# Altium PCB PCB1.PcbDoc (part 2 of 2)
Units mil, origin at the board's own origin, x right, y up, seen from the top; angles counter-clockwise.
Board outline 1411.86 x 1442.8 mil, 4 copper layers (Top Layer, GND, Sign, Bottom Layer), stack 74.06 mil thick; 79 components, 66 nets, 343 pads, 393 vias.
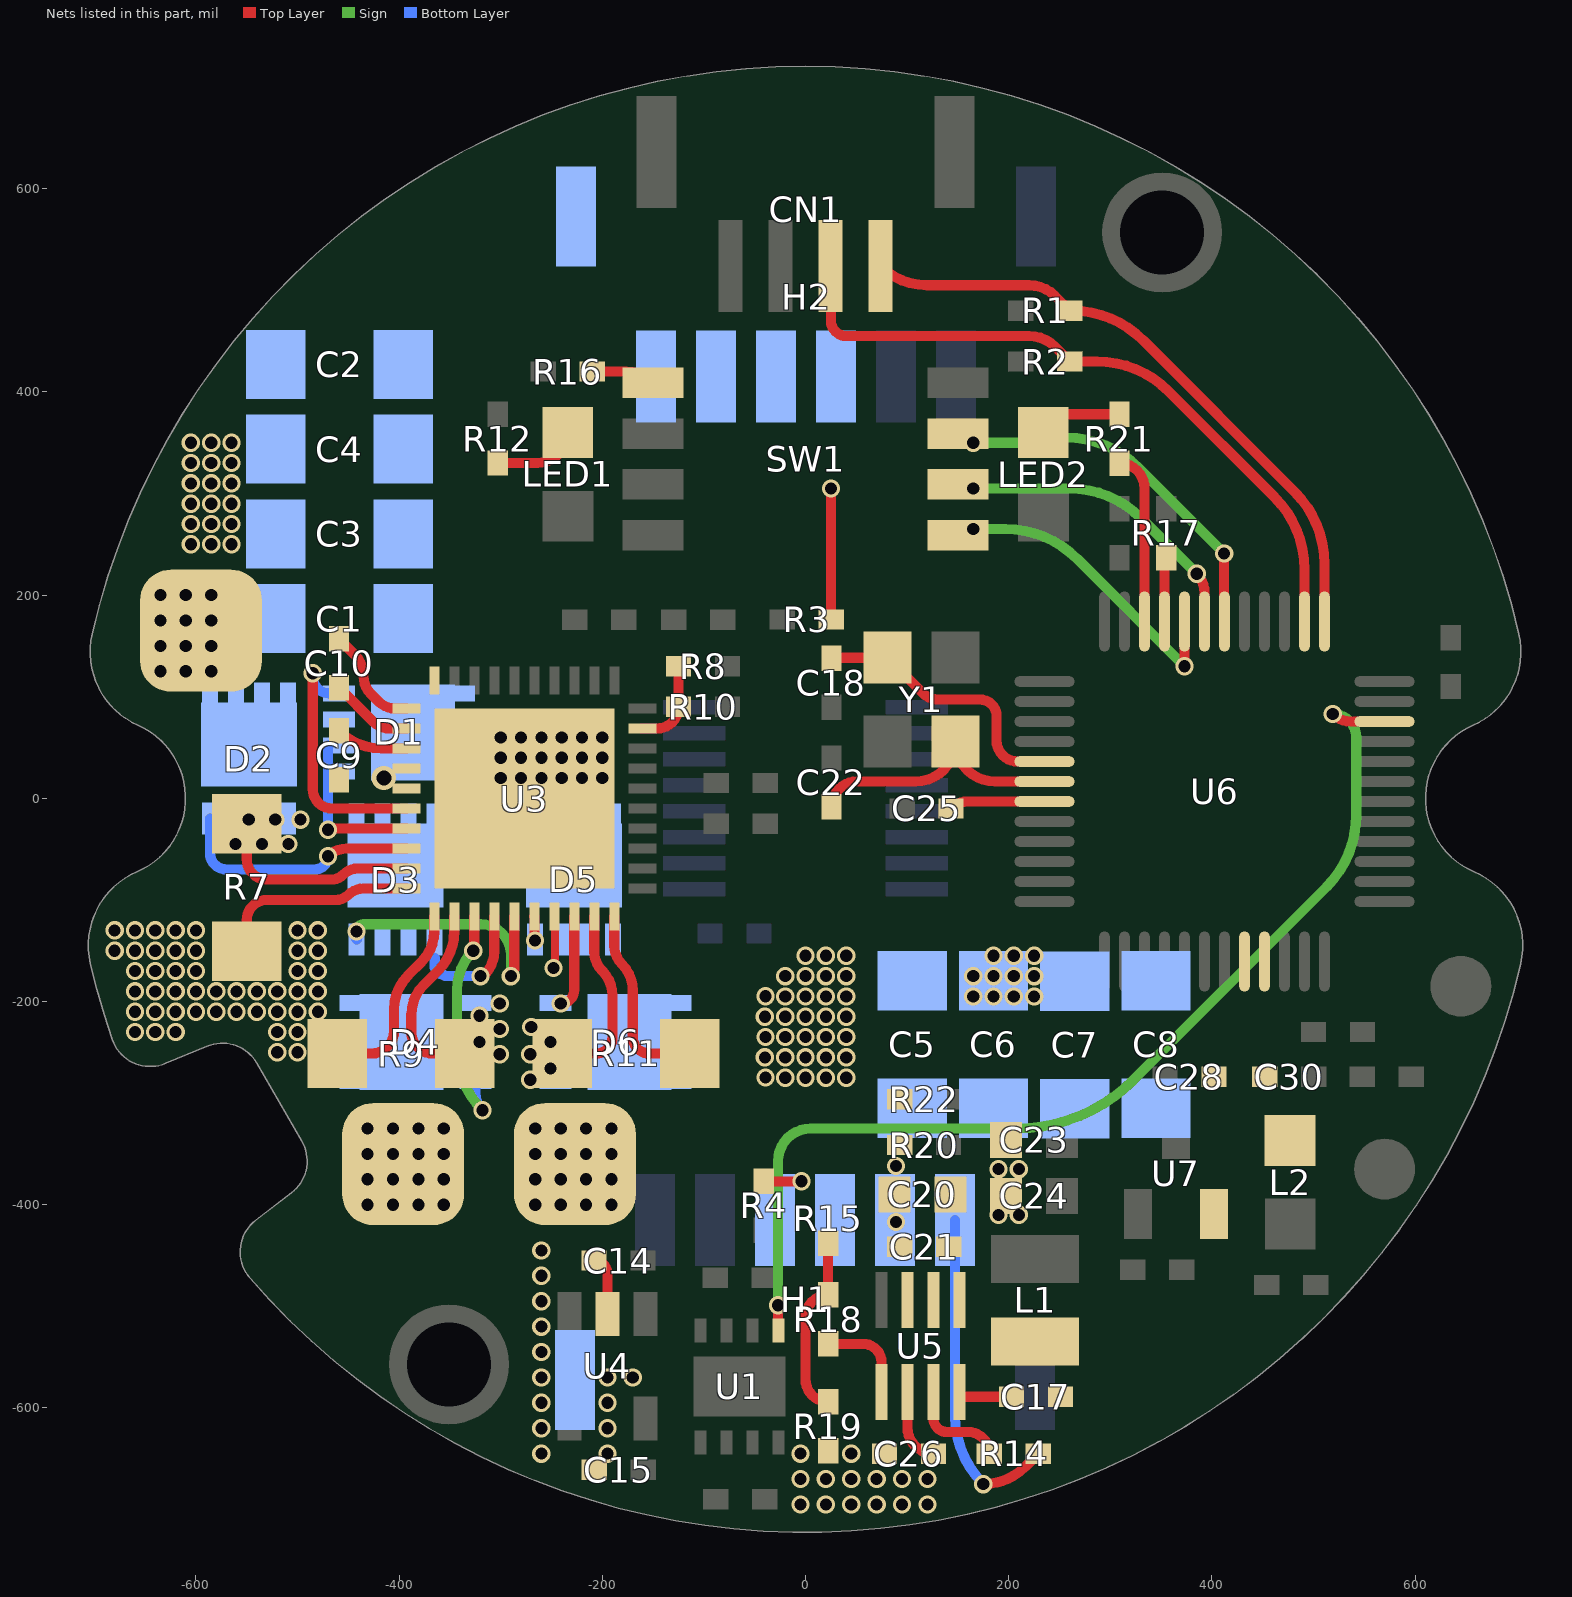
[diagram p4: the nets of this part, all layers, seen from the top]

## Via types
v1: diameter 18, hole 12, Top Layer to Bottom Layer, tented both sides, 391 vias
v2: diameter 24, hole 15, Top Layer to Bottom Layer, tented both sides, 2 vias

## Nets (pads, with @x,y where several pads share a name; then routed paths per layer and width w, separated by ;. In a path a pad name is that pad's centre, name@x,y a point inside that pad or via, vN(x,y) a via of type N, cw(c..) or ccw(c..) an arc to the next point about the centre after c; other vN are vias at no path point) (continued)
FDCAN_TX: U1.1 U6.34 | length 1060.7
  Top Layer w10: v1(-27,-499) -27,-523.86 U1.1@-26.71,-523.86 ; v1@519,83 ccw(c536.86,100.86) 536.86,75.6 U6.34@569.86,75.6
  Sign w10: v1(-27,-499) -27,-357 cw(c5,-357) 5,-325 207.53,-325 ccw(c207.57,-162.22) 322.71,-277.29 512.71,-87.29 ccw(c442,-16.58) 542,-16.58 542,60 ccw(c519,60) v1(519,83)
NetC9_1: C9.1 U3.3 | length 70.8
  Top Layer w10: C9.1@-459.14,66.35 ccw(c-417.18,108.31) -417.18,48.97 U3.3@-392.97,48.97
NetC10_1: C10.1 U3.1 | length 104.6
  Top Layer w10: C10.1@-459.14,156.97 -444.07,141.9 cw(c-465.98,120) -435,120 ccw(c-410.86,120) -427.93,102.93 -420,95 ; -420,95 ccw(c-403.94,111.06) -403.94,88.35 U3.1@-392.97,88.35
NetC10_2: C10.2 U3.2 | length 81.9
  Top Layer w10: C10.2@-459.14,108.77 -458.77,108.77 -425,75 ; -425,75 ccw(c-409.69,90.31) -409.69,68.66 U3.2@-392.97,68.66
NetC17_1: C17.1 U5.4 | length 55.1
  Top Layer w10: U5.4@151.52,-584.52 151.52,-588.06 152.42,-588.97 C17.1@202.73,-588.97
NetC17_2: C17.2 L1.1 U5.6
NetC18_1: C18.1 U6.5 Y1.3 | length 270.5
  Top Layer w10: C18.1@26.02,138.38 Y1.3@80.54,138.38 115.76,103.15 ccw(c130.11,117.5) 130.11,97.21 171.79,97.21 cw(c171.79,81) 188,81 188,57 ccw(c208.77,57) 208.77,36.23 U6.5@235.22,36.23
NetC22_1: C22.1 U6.6 Y1.1 | length 268.7
  Top Layer w10: C22.1@25.54,-8.5 cw(c50.58,-8.5) 50.58,16.54 108.31,16.54 ccw(c108.31,55.7) Y1.1@147.47,55.7 ccw(c186.63,55.7) 186.63,16.54 U6.6@235.22,16.54
NetC25_1: C25.1 U6.7 | length 93.9
  Top Layer w10: C25.1@143.2,-10 cw(c159.77,-26.57) 159.77,-3.14 U6.7@235.22,-3.14
NetC26_2: C26.2 U5.2 | length 75.1
  Top Layer w10: U5.2@100.34,-584.52 100.34,-619.38 ccw(c125.93,-619.38) C26.2@125.93,-644.97
NetC28_1: C28.1 U6.20 U7.2
NetC30_2: C30.2 L2.2 U6.21
NetD1_G: D1.G U3.6 | length 245.6
  Top Layer w10: v1(-485,123) -485,9 ccw(c-465.92,9) -465.92,-10.08 U3.6@-392.97,-10.08
  Bottom Layer w10: v1(-485,123) -485,119.33 ccw(c-469.06,119.33) D1.G@-469.06,103.39
NetD2_G: D2.G U3.8 | length 247.9
  Top Layer w10: v1@-469.98,-56.98 cw(c-451.78,-75.22) -451.78,-49.45 U3.8@-392.97,-49.45
  Sign w10: v1@-471.61,-58.53 ccw(c-501.38,-25.62) v1@-470,-57
  Bottom Layer w10: D2.G@-586.18,-20 -586.18,-53.82 ccw(c-570,-53.82) -570,-70 -483,-70 ccw(c-483,-57) v1(-470,-57)
NetD2_S: D2.S R7.2 U3.9 | length 206.3
  Top Layer w10: R7.2@-550,-25 -550,-60 ccw(c-530,-60) -530,-80 -467.07,-80 ccw(c-467.07,-62.93) -455,-75 ; -455,-75 cw(c-440.86,-89.14) -440.86,-69.14 U3.9@-392.97,-69.14
  other v1: -561,-45 -535,-45 -509,-45 -548,-21 -522,-21 -497,-21
NetD3_G: D3.G U3.15 | length 261.8
  Top Layer w10: v1@-290,-175 ccw(c-298.04,-166.96) -287.05,-169.89 ccw(c-298.04,-166.96) -286.67,-166.96 U3.15@-286.67,-116.39
  Sign w10: v1(-442,-131) cw(c-435,-131) -435,-124 -320,-124 cw(c-320,-154) -290,-154 v1(-290,-175)
  Bottom Layer w10: v1(-442,-131) -442,-132 -441.78,-132.22 D3.G@-441.78,-139.06
NetD4_G: D4.G U3.13 | length 232.4
  Top Layer w10: v1(-327,-150) -326.12,-149.12 -326.12,-116.46 U3.13@-326.04,-116.39
  Sign w10: v1@-327,-150 ccw(c-288.37,-188.63) -343,-188.63 -343,-246.64 ccw(c-257.64,-246.64) v1@-318,-307
  Bottom Layer w10: D4.G@-324.94,-278.39 -324.94,-290.25 ccw(c-301.25,-290.25) v1(-318,-307)
NetD4_S: D4.S R9.2 U3.12 | length 191.7
  Top Layer w10: U3.12@-345.73,-116.39 -345.73,-130.86 cw(c-400.94,-130.86) -361.93,-169.93 -375.98,-183.98 ccw(c-346.96,-213) -388,-213 -388,-230 ccw(c-366.7,-230) -366.64,-251.3 R9.2@-335.46,-251.3
  other v1: -301,-252 -321,-240 -301,-227 -321,-214 -301,-202
NetD5_G: D5.G U3.16 | length 23.8
  Top Layer w10: U3.16@-266.99,-116.39 -266.91,-116.46 -266.91,-139.31 v1(-266.32,-139.9)
NetD6_G: D6.G U3.18 | length 93.7
  Top Layer w10: v1(-241,-202) ccw(c-241,-188.62) -227.62,-188.62 U3.18@-227.62,-116.39
  Bottom Layer w10: D6.G@-241.06,-201.61 -241.06,-201.94 v1(-241,-202)
NetD6_S: D6.S R11.2 U3.19 | length 182.2
  Top Layer w10: R11.2@-239.46,-251.3 -206.3,-251.3 ccw(c-206.3,-235) -190,-235 -190,-194.13 ccw(c-224.12,-194.13) -199.99,-170.01 cw(c-180.83,-150.85) -207.93,-150.85 U3.19@-207.93,-116.39
  other v1: -271,-277 -251,-266 -271,-252 -251,-240 -270,-225
NetLED1_1: LED1.1 R12.2 | length 86.1
  Top Layer w10: R12.2@-303,330 -264,330 ccw(c-264,360) LED1.1@-234,360
NetLED2_1: LED2.1 R21.2 | length 81.6
  Top Layer w10: LED2.1@234,360 255.43,378 R21.2@309,378
NetR8_2: R8.2 R10.2 U3.29 | length 87.9
  Top Layer w10: U3.29@-160.69,68.66 -146.34,68.66 ccw(c-146.34,90) R10.2@-125,90 R8.2@-125,130
NetR14_2: R14.2 U5.3 | length 100.7
  Top Layer w10: U5.3@125.93,-584.52 125.93,-610.17 ccw(c139.83,-610.17) 130,-620 ; 130,-620 ccw(c138.57,-611.43) 138.57,-623.55 159.51,-623.55 cw(c159.51,-644.97) R14.2@180.93,-644.97
NetR15_1: R15.1 R18.2 R19.2 | length 181.5
  Top Layer w10: R19.2@22.26,-594.06 cw(c22.26,-571.8) 0,-571.8 0,-511.03 cw(c22.26,-511.03) R18.2@22.26,-488.77 R15.1@22.26,-437.97
NetR16_2: R16.2 SW1.5 | length 62.9
  Top Layer w10: R16.2@-210,420 -176.56,420 cw(c-176.56,382.44) SW1.5@-150,409
NetR17_1: R17.1 U6.45 | length 63.2
  Top Layer w10: U6.45@353.33,174.02 353.33,232.77 cw(c359.03,232.77) R17.1@355,236.8
NetR18_1: R18.1 U5.1 | length 92.3
  Top Layer w10: R18.1@22.26,-536.97 56.72,-536.97 cw(c56.72,-555) 74.75,-555 U5.1@74.75,-584.52
PGND: C1.1 C2.1 C3.1 C4.1 C5.1 C6.1 C7.1 C8.1 C14.1 C15.1 C20.1 C21.1 C23.1 C24.1 C26.1 H1.3 H1.4 H1.7 H2.3 H2.4 H2.8 R3.2 R4.2 R7.1 R9.1 R11.1 R19.1 R22.2 U3.10 U3.11 U3.20 U3.40 U3.41 U4.2 U5.5 | length 810.3
  Top Layer w10: R7.1@-550,-150.4 -550,-120 cw(c-530,-120) -530,-100 -462.07,-100 ccw(c-462.07,-82.93) -450,-95 ; R9.1@-460.86,-251.3 -427.3,-251.3 ccw(c-427.3,-229) -405,-229.09 -405,-208 cw(c-356.72,-208) -390.88,-173.88 -377.72,-160.72 ccw(c-407.44,-131) -365.41,-131.06 ccw(c-407.44,-131) -365.41,-131 U3.11@-365.41,-116.39 ; -450,-95 cw(c-435.09,-109.91) -435.09,-88.82 U3.10@-392.97,-88.82 ; C14.1@-208.2,-455 cw(c-208.2,-468.2) -195,-468.2 U4.2@-195,-507.81 ; U3.20@-188.25,-116.39 -188.25,-145.08 ccw(c-162.5,-145.08) -180.71,-163.29 cw(c-206.56,-189.14) -170,-189.14 -170,-235 ccw(c-153.7,-235) -153.7,-251.3 R11.1@-114.06,-251.3 ; R4.2@-40.8,-377 v1(-4,-377) ; R3.2@25,176.2 25.1,176.3 25.1,304.9 v1(25,305)
  other v1: -5,-695 20,-695 45,-695 70,-695 95,-695 120,-695 -5,-670 20,-670 45,-670 70,-670 95,-670 120,-670 -260,-645 -195,-645 -5,-645 45,-645 -260,-620 -195,-620 -260,-595 -195,-595 -260,-570 -195,-570 -170,-570 -260,-545 -260,-520 -260,-495 -260,-470 -260,-445 190,-410 210,-410 190,-365 210,-365 -39.39,-274.87 -20,-275 0,-275 20,-275 40,-275 -40,-255 -20,-255 0,-255 20,-255 40,-255 -520,-250 -500,-250 -39.39,-234.87 -20,-235 0,-235 20,-235 40,-235 -660,-230 -640,-230 -620,-230 -520,-230 -500,-230 -40,-215 -20,-215 0,-215 20,-215 40,-215 -660,-210 -640,-210 -620,-210 -600,-210 -580,-210 -560,-210 -540,-210 -520,-210 -500,-210 -480,-210 -39.39,-194.87 -20,-195 0,-195 20,-195 40,-195 165,-195 185,-195 205,-195 225,-195 -660,-190 -640,-190 -620,-190 -600,-190 -580,-190 -560,-190 -540,-190 -520,-190 -500,-190 -480,-190 -20,-175 0,-175 20,-175 40,-175 165,-175 185,-175 205,-175 225,-175 -660,-170 -640,-170 -620,-170 -600,-170 -500,-170 -480,-170 0,-155 20,-155 40,-155 185,-155 205,-155 225,-155 -680,-150 -660,-150 -640,-150 -620,-150 -600,-150 -500,-150 -480,-150 -680,-130 -660,-130 -640,-130 -620,-130 -600,-130 -500,-130 -480,-130 -300,20 -280,20 -260,20 -240,20 -220,20 -200,20 -300,40 -280,40 -260,40 -240,40 -220,40 -200,40 -300,60 -280,60 -260,60 -240,60 -220,60 -200,60 -605,250 -585,250 -565,250 -605,270 -585,270 -565,270 -605,290 -585,290 -565,290 -605,310 -585,310 -565,310 -605,330 -585,330 -565,330 -605,350 -585,350 -565,350
SHA: D1.S D2.D pad.14@-595,165 U3.7 | length 161
  Top Layer w10: v1(-470,-31) -468.85,-29.85 -393.05,-29.85 U3.7@-392.97,-29.77
  Bottom Layer w10: v1(-470,-31) -470,49.94 cw(c-466.79,49.94) D1.S@-469.06,52.21
  other v1: -635,125 -610,125 -585,125 -635,150 -610,150 -585,150 -635,175 -610,175 -585,175 -635,200 -610,200 -585,200
SHB: D3.S D4.D pad.14@-396,-360 U3.14 | length 122.3
  Top Layer w10: v1(-320,-175) -317.64,-174.02 -315.8,-173.26 -314.39,-171.85 -314.12,-171.59 ccw(c-337.96,-150.84) -306.36,-150.84 U3.14@-306.36,-116.39
  Bottom Layer w10: -365,-157.13 -365,-165 ccw(c-357,-165) -357,-173 -355,-175 v1(-320,-175)
  other v1: -431,-400 -406,-400 -381,-400 -356,-400 -431,-375 -406,-375 -381,-375 -356,-375 -431,-350 -406,-350 -381,-350 -356,-350 -431,-325 -406,-325 -381,-325 -356,-325
SHC: D5.S D6.D pad.14@-227,-360 U3.17 | length 51.5
  Top Layer w8: v1(-248,-167) -246.62,-165.62 -246.62,-117.06 U3.17@-247.3,-116.39
  other v1: -266,-400 -241,-400 -216,-400 -191,-400 -266,-375 -241,-375 -216,-375 -191,-375 -266,-350 -241,-350 -216,-350 -191,-350 -266,-325 -241,-325 -216,-325 -191,-325
STATE_LED: R21.1 U6.46 | length 169.8
  Top Layer w10: R21.1@309,329.8 cw(c309,305.16) 333.64,305.16 U6.46@333.64,174.02
SW_Bit0: SW1.1 U6.44 | length 303.6
  Top Layer w10: v1(373,130) U6.44@373.01,174.02
  Sign w10: v1(165,265) 196.58,265 cw(c196.58,165) 267.29,235.71 v1(373,130)
SW_Bit1: SW1.2 U6.43 | length 299.5
  Top Layer w10: v1@385,221 cw(c366.4,202.4) 392.7,202.4 U6.43@392.7,174.02
  Sign w10: v1(165,305) 259.58,305 cw(c259.58,205) 330.29,275.71 v1(385,221)
SW_Bit2: SW1.3 U6.42 | length 377.9
  Top Layer w10: SW1.3@150,359 156,359 v1(165,350) ; v1(412,241) 412,174.4 U6.42@412.38,174.02
  Sign w10: v1(165,350) 251.58,350 256.58,355 cw(c256.58,255) 327.29,325.71 v1(412,241)
SWCLK: CN1.3 R2.1 U6.38 | length 689.6
  Top Layer w10: CN1.3@24.61,523.9 25,523.9 25,470 ccw(c40,470) 40,455 220,455 cw(c220,418.79) 245.61,444.39 R2.1@260,430 286.58,430 cw(c286.58,330) 357.29,400.71 461.83,296.17 cw(c391.12,225.46) 491.12,225.46 U6.38@491.12,174.02
SWDIO: CN1.4 R1.1 U6.37 | length 626.5
  Top Layer w10: CN1.4@73.82,523.9 ccw(c119.45,569.54) 119.45,505 220,505 cw(c220,468.79) 245.61,494.39 R1.1@260,480 261.58,480 cw(c261.58,380) 332.29,450.71 481.52,301.48 cw(c410.81,230.77) 510.81,230.77 U6.37@510.81,174.02
VBUS: C1.2 C2.2 C3.2 C4.2 C5.2 C6.2 C7.2 C8.2 C9.2 C20.2 C21.2 D1.D D3.D D5.D H1.1 H1.2 H2.1 H2.2 R14.1 R20.2 U3.4 U3.5 U5.7 | length 331.5
  Top Layer w10: v1(175,-675) ccw(c175,-616.83) 188.26,-673.47 ccw(c175,-616.83) 204.82,-666.78 ccw(c175,-616.83) 216.13,-657.96 R14.1@229.13,-644.97
  Bottom Layer w10: H1.1@147.16,-415 147.16,-607.8 ccw(c242.2,-607.8) v1(175,-675)
  other v1: 89,-417 89,-362
  other v2: -415,20
pads on no net: CN1.5 CN1.6 H1.8 U2.1 U2.2 U2.3 U2.10 U2.13 U2.14 U2.15 U2.16 U3.28 U4.4 U5.8 U6.2 U6.3 U6.4 U6.22 U6.26 U6.39 U6.40 U6.41

## Polygon pours and split planes (outlines as drawn)
DGND on Bottom Layer "DGND_L04_P047" (solid, remove dead copper, pour order 47): -170,-140 -170,273.61 62.57,273.61 62.57,704.03 99.63,700.63 183.31,683.75 259.8,658.97 343.48,619.11 398.06,586.42 462.71,535.79 520.53,479.41 565.06,422.66 589.48,387.47 611.39,353.35 637.6,304.51 655.92,266.08 672.8,222.27 684.29,181.33 687.52,161.94 687.52,138.59 683.57,118.48 673.87,105.55 656.28,93.34 632.57,77.9 613.9,58.87 600.25,38.76 593.43,12.9 593.79,-8.65 599.89,-31.27 609.59,-49.59 618.93,-63.95 631.5,-78.32 647.3,-89.45 665.97,-98.07 678.54,-112.8 686.08,-132.55 686.96,-154.97 676.95,-199.29 658.36,-252.67 629.29,-318.44 592.6,-380.39 544.94,-448.54 468.21,-525.74 401.02,-579.6 345.73,-620.58 284.73,-647.27 250.07,-660.59 250.07,-140
PGND on Bottom Layer "Bottom Layer-PGND" (solid, remove dead copper, pour order 46): -303.2,-643.93 -286.34,-651.28 -236.34,-670.89 -191.34,-685.89 -135.53,-698.27 -85.97,-705.14 -40.59,-708.72 -2.97,-710.81 51.07,-709.02 91.97,-704.54 130.49,-698.27 168.41,-690.15 213.66,-675.89 227.97,-669.86 238.66,-662.41 238.66,-210 385,-210 385,-145 238.66,-145 -173.84,-145 -173.84,370 46.16,370 46.16,703.41 23.89,705.45 -58.35,703.3 -140.59,691.8 -214.93,672.77 -297.17,642.6 -358.94,609.92 -429.69,561.08 -484.28,516.55 -530.6,469.51 -576.57,410.61 -608.53,363.56 -631.52,318.67 -654.86,267.68 -675.69,209.5 -688.26,162.81 -690.41,142.34 -689.7,126.18 -683.93,109.9 -674.57,100.79 -662.26,92.66 -650.19,86.26 -629.75,73.94 -614.73,57.94 -606.6,40.2 -603.65,20.01 -600.45,-1.42 -602.17,-22.35 -608.57,-45.99 -619.9,-60.27 -635.66,-73.82 -651.42,-82.68 -662.26,-89.58 -674.08,-98.69 -683.93,-108.05 -690.83,-123.32 -693.29,-140.06 -693.54,-156.32 -688.36,-180.21 -678.51,-216.66 -670.88,-233.16 -661.52,-244.73 -650.68,-248.42 -640.34,-248.18 -628.27,-244.24 -614.73,-238.33 -594.78,-230.69 -578.53,-227.24 -564.74,-228.48 -547.25,-234.14 -537.89,-242.51 -524.84,-262.22 -513.02,-284.63 -481,-346.19 -477.56,-363.93 -481.99,-379.93 -489.62,-394.22 -505.63,-405.05 -531.24,-424.26 -537.15,-434.36 -541.09,-444.46 -539.62,-460.46 -532.23,-474.99 -515.24,-491.99 -469.68,-535.33 -421.16,-573.26 -367.47,-609.46
VBUS on Bottom Layer "Bottom Layer-VBUS" (solid, remove dead copper, pour order 22): -455,-110 -157,-110 -157,-4 -320,-4 -320,110 -365,155 -365,176.34 -341.34,200 -170,200 -130,160 410,160 450,120 450,-160 385,-225 60,-225 60,-470 175,-470 175,-350 440,-350 560,-230 560,180 470,270 25,270 -65,360 -65,475 -435,475 -435,-5 -455,-5
SHA on Bottom Layer "SHA_L04_P002" (solid, remove dead copper, pour order 2): -640,230 -660,210 -660,120 -600,60 -600,5 -440,5 -440,85 -495,85 -495,125 -560,125 -560,230
NetD6_S on Bottom Layer "NETD6_S_L04_P009" (solid, remove dead copper, pour order 9): -280,-220 -280,-290 -225,-290 -225,-220
NetD4_S on Bottom Layer "NETD4_S_L04_P008" (solid, remove dead copper, pour order 8): -345,-190 -345,-265 -290,-265 -290,-190
SHC on Bottom Layer "SHC_L04_P007" (solid, remove dead copper, pour order 7): -260,-120 -260,-185 -215,-185 -215,-300 -270,-300 -290,-320 -290,-400 -270,-420 -185,-420 -175,-410 -175,-360 -175,-355 -110,-290 -110,-170 -160,-120
SHB on Bottom Layer "SHB_L04_P006" (solid, remove dead copper, pour order 6): -425,-120 -425,-190 -460,-190 -460,-400 -440,-420 -355,-420 -335,-400 -335,-310 -355,-290 -355,-120
NetD2_S on Bottom Layer "NETD2_S_L04_P003" (solid, remove dead copper, pour order 3): -570,-5 -570,-55 -486,-55 -486,-5
PGND on Top Layer "GND-PGND" (solid, remove dead copper, pour order 50): -357.6,610.82 -357.6,580 -357.6,-140 240,-140 240,-661.51 229.3,-668.97 215,-675 169.75,-689.26 131.83,-697.38 93.31,-703.65 52.41,-708.13 -1.63,-709.92 -39.25,-707.83 -84.63,-704.25 -134.19,-697.38 -190,-685 -235,-670 -285,-650.39 -301.86,-643.04 -366.13,-608.57 -419.82,-572.36 -468.34,-534.44 -513.9,-491.09 -530.89,-474.1 -538.28,-459.57 -539.76,-443.56 -535.82,-433.47 -529.91,-423.37 -504.29,-404.16 -488.28,-393.32 -480.65,-379.04 -476.22,-363.03 -479.67,-345.3 -511.68,-283.73 -523.5,-261.32 -536.55,-241.62 -545.91,-233.25 -563.4,-227.58 -577.19,-226.35 -593.44,-229.8 -613.39,-237.44 -626.94,-243.35 -639,-247.29 -649.35,-247.53 -660.18,-243.84 -669.54,-232.26 -677.18,-215.76 -687.03,-179.31 -692.2,-155.43 -691.95,-139.17 -689.49,-122.43 -682.59,-107.16 -672.74,-97.8 -660.92,-88.69 -650.09,-81.79 -634.32,-72.93 -618.56,-59.38 -607.23,-45.1 -600.83,-21.46 -599.11,-0.52 -602.31,20.9 -605.26,41.1 -613.39,58.83 -628.41,74.84 -648.85,87.15 -660.92,93.55 -673.24,101.68 -682.59,110.79 -688.36,127.07 -689.08,143.23 -686.92,163.7 -674.35,210.39 -653.52,268.57 -630.18,319.56 -607.2,364.45 -575.23,411.5 -529.27,470.4 -482.94,517.44 -428.35,561.97
PGND on Top Layer "PGND_L01_P036" (solid, remove dead copper, pour order 36): -270,-435 -270,-655 -235,-670 -190,-685 -134.19,-697.38 -84.63,-704.25 -39.25,-707.83 -1.63,-709.92 52.41,-708.13 93.31,-703.65 131.83,-697.38 169.75,-689.26 215,-675 229.3,-668.97 240,-661.51 240,-140 -145,-140 -145,-435
DGND on Top Layer "Top Layer-DGND 1" (solid, remove dead copper, pour order 51): -340,-125 250,-125 250,-661.7 284.67,-648.38 345.67,-621.69 400.95,-580.7 468.15,-526.85 544.87,-449.65 592.53,-381.5 629.23,-319.54 658.3,-253.78 676.88,-200.4 686.89,-156.08 686.02,-133.66 678.48,-113.9 665.91,-99.18 647.23,-90.56 631.43,-79.43 618.86,-65.06 609.52,-50.7 599.83,-32.38 593.72,-9.76 593.36,11.79 600.19,37.65 613.83,57.76 632.51,76.79 656.21,92.24 673.81,104.45 683.5,117.38 687.45,137.49 687.45,160.83 684.22,180.22 672.73,221.16 655.85,264.98 637.54,303.4 611.32,352.24 589.41,386.36 564.99,421.56 520.46,478.3 462.64,534.68 398,585.32 343.41,618 259.74,657.86 183.24,682.64 99.56,699.52 80,701.32 25.23,706.34 -57.01,704.19 -139.25,692.7 -213.59,673.66 -295.83,643.5 -340,620.13
3V3 on Top Layer "3V3_L01_P033" (solid, remove dead copper, pour order 33): 515,-305 515,-320 545,-320 565,-300 565,-220 520,-175 520,-130 505,-130 505,-200 535,-230 535,-285
PGND on Top Layer "PGND_L01_P043" (solid, remove dead copper, pour order 43): -685,-115 -430,-115 -430,-285 -510,-285 -531.54,-250.97 -538.77,-241.33 -548.94,-233.84 -564.2,-227.95 -579.45,-227.68 -600.87,-232.23 -615.59,-239.19 -633.79,-245.35 -649.32,-247.22 -660.03,-243.21 -669.39,-232.77 -675.28,-217.24 -684.92,-178.7 -690.81,-155.14 -691.88,-135.33 -685.72,-116.06
3V3 on Top Layer "3V3_L01_P035" (solid, remove dead copper, pour order 35): -175,-585 -175,-675 -125,-675 -95,-645 -95,-620 -120,-620 -120,-585
DGND on Top Layer "DGND_L01_P034" (solid, remove dead copper, pour order 34): 485,-130 500,-130 500,-205 525,-230 525,-285 520,-290 490,-290 475,-275 475,-205 485,-195
DVDD on Top Layer "DVDD_L01_P033" (solid, remove dead copper, pour order 33): 515,-375 535,-375 535,-430 510,-455 470,-455 470,-495 430,-495 430,-375
NetC30_2 on Top Layer "NETC30_2_L01_P032" (solid, remove dead copper, pour order 32): 445,-130 445,-245 430,-260 430,-365 505,-365 505,-300 485,-300 465,-280 465,-205 460,-200 460,-130
DGND on Top Layer "Top Layer-DGND" (solid, remove dead copper, pour order 31): 340,-290 350,-300 350,-485 385,-485 385,-450 380,-445 380,-250 420,-210 420,-130 405,-130 405,-200 340,-265
NetC28_1 on Top Layer "NETC28_1_L01_P029" (solid, remove dead copper, pour order 29): 425,-130 440,-130 440,-235 420,-255 420,-440 385,-440 385,-255 425,-215
5V on Top Layer "5V_L01_P027" (solid, remove dead copper, pour order 27): 170,-430 170,-485 340,-485 340,-310 230,-310 230,-430
PGND on Top Layer "PGND_L01_P026" (solid, remove dead copper, pour order 26): 120,-360 120,-455 145,-455 145,-520 160,-520 160,-420 220,-420 220,-310 170,-310 170,-360
NetC17_2 on Top Layer "NETC17_2_L01_P025" (solid, remove dead copper, pour order 25): 115,-465 115,-550 170,-550 170,-570 230,-570 230,-605 275,-605 275,-500 170,-500 170,-525 135,-525 135,-465
VBUS on Top Layer "VBUS_L01_P013" (solid, remove dead copper, pour order 13): 65,-325 65,-435 90,-460 90,-525 110,-525 110,-325
NetD6_S on Top Layer "NETD6_S_L01_P011" (solid, remove dead copper, pour order 11): -280,-215 -280,-285 -210,-285 -210,-215
NetD4_S on Top Layer "NETD4_S_L01_P010" (solid, remove dead copper, pour order 10): -365,-285 -290,-285 -290,-191.79 -365,-191.79
NetD2_S on Top Layer "NETD2_S_L01_P004" (solid, remove dead copper, pour order 4): -585,5 -585,-55 -485,-55 -485,-5 -485,5
VBUS on Top Layer "VBUS_L01_P001" (solid, remove dead copper, pour order 1): -470,40 -470,5 -380,5 -380,35 -445,35 -450,40
PGND on GND "GND-PGND" (solid, remove dead copper, pour order 42): -301.86,-643.04 -285,-650.39 -235,-670 -190,-685 -134.19,-697.38 -84.63,-704.25 -39.25,-707.83 -1.63,-709.92 52.41,-708.13 93.31,-703.65 131.83,-697.38 169.75,-689.26 215,-675 229.3,-668.97 240,-661.51 240,-140 -172.5,-140 -172.5,280 cw(c-165,280) -165,287.5 47.5,287.5 47.5,704.3 25.23,706.34 -57.01,704.19 -139.25,692.7 -213.59,673.66 -295.83,643.5 -357.6,610.82 -428.35,561.97 -482.94,517.44 -529.27,470.4 -575.23,411.5 -607.2,364.45 -630.18,319.56 -653.52,268.57 -674.35,210.39 -686.92,163.7 -689.08,143.23 -688.36,127.07 -682.59,110.79 -673.24,101.68 -660.92,93.55 -648.85,87.15 -628.41,74.84 -613.39,58.83 -605.26,41.1 -602.31,20.9 -599.11,-0.52 -600.83,-21.46 -607.23,-45.1 -618.56,-59.38 -634.32,-72.93 -650.09,-81.79 -660.92,-88.69 -672.74,-97.8 -682.59,-107.16 -689.49,-122.43 -691.95,-139.17 -692.2,-155.43 -687.03,-179.31 -677.18,-215.76 -669.54,-232.26 -660.18,-243.84 -649.35,-247.53 -639,-247.29 -626.94,-243.35 -613.39,-237.44 -593.44,-229.8 -577.19,-226.35 -563.4,-227.58 -545.91,-233.25 -536.55,-241.62 -523.5,-261.32 -511.68,-283.73 -479.67,-345.3 -476.22,-363.03 -480.65,-379.04 -488.28,-393.32 -504.29,-404.16 -529.91,-423.37 -535.82,-433.47 -539.76,-443.56 -538.28,-459.57 -530.89,-474.1 -513.9,-491.09 -468.34,-534.44 -419.82,-572.36 -366.13,-608.57
DGND on GND "DGND_L02_P041" (solid, remove dead copper, pour order 41): -157.5,-125 -157.5,272.5 62.5,272.5 62.5,702.92 99.56,699.52 183.24,682.64 259.74,657.86 343.41,618 398,585.32 462.64,534.68 520.46,478.3 564.99,421.56 589.41,386.36 611.32,352.24 637.54,303.4 655.85,264.98 672.73,221.16 684.22,180.22 687.45,160.83 687.45,137.49 683.5,117.38 673.81,104.45 656.21,92.24 632.51,76.79 613.83,57.76 600.19,37.65 593.36,11.79 593.72,-9.76 599.83,-32.38 609.52,-50.7 618.86,-65.06 631.43,-79.43 647.23,-90.56 665.91,-99.18 678.48,-113.9 686.02,-133.66 686.89,-156.08 676.88,-200.4 658.3,-253.78 629.23,-319.54 592.53,-381.5 544.87,-449.65 468.15,-526.85 400.95,-580.7 345.67,-621.69 284.67,-648.38 250,-661.7 250,-125
DGND on Sign "Sign-DGND" (solid, remove dead copper, pour order 48): 247.5,-607.5 247.5,-662.66 284.67,-648.38 345.67,-621.69 400.95,-580.7 468.15,-526.85 544.87,-449.65 592.53,-381.5 629.23,-319.54 658.3,-253.78 676.88,-200.4 686.89,-156.08 686.02,-133.66 678.48,-113.9 665.91,-99.18 647.23,-90.56 631.43,-79.43 618.86,-65.06 609.52,-50.7 599.83,-32.38 593.72,-9.76 593.36,11.79 600.19,37.65 613.83,57.76 632.51,76.79 656.21,92.24 673.81,104.45 683.5,117.38 687.45,137.49 687.45,160.83 684.22,180.22 672.73,221.16 655.85,264.98 637.54,303.4 611.32,352.24 589.41,386.36 564.99,421.56 520.46,478.3 462.64,534.68 398,585.32 343.41,618 259.74,657.86 183.24,682.64 99.56,699.52 25.23,706.34 -57.01,704.19 -139.25,692.7 -213.59,673.66 -295.83,643.5 -357.6,610.82 -428.35,561.97 -482.94,517.44 -529.27,470.4 -575.23,411.5 -378.98,410.86 -380.14,177.6 -122.5,182.65 -122.5,-130 247.5,-130 247.5,-317.5 -112.5,-317.5 -112.5,-607.5
PGND on Sign "Sign-PGND" (solid, remove dead copper, pour order 44): -127.5,-615 -127.5,-310 cw(c-120,-310) -120,-302.5 235,-302.5 235,-140 -137.5,-140 -137.5,167.35 -392.55,162.35 -390.99,394.74 -589.18,394.74 -615.18,351.69 -639,303.4 -657.17,258.95 -674.35,210.39 -686.92,163.7 -689.08,143.23 -688.36,127.07 -682.59,110.79 -673.24,101.68 -660.92,93.55 -648.85,87.15 -628.41,74.84 -613.39,58.83 -605.26,41.1 -602.31,20.9 -599.11,-0.52 -600.83,-21.46 -607.23,-45.1 -618.56,-59.38 -634.32,-72.93 -650.09,-81.79 -660.92,-88.69 -672.74,-97.8 -682.59,-107.16 -689.49,-122.43 -691.95,-139.17 -692.2,-155.43 -687.03,-179.31 -677.18,-215.76 -669.54,-232.26 -660.18,-243.84 -649.35,-247.53 -639,-247.29 -626.94,-243.35 -613.39,-237.44 -593.44,-229.8 -577.19,-226.35 -563.4,-227.58 -545.91,-233.25 -536.55,-241.62 -523.5,-261.32 -511.68,-283.73 -479.67,-345.3 -476.22,-363.03 -480.65,-379.04 -488.28,-393.32 -504.29,-404.16 -529.91,-423.37 -535.82,-433.47 -539.76,-443.56 -538.28,-459.57 -530.89,-474.1 -513.9,-491.09 -468.34,-534.44 -419.82,-572.36 -366.13,-608.57 -301.86,-643.04 -240,-670 -165.9,-693.71 -71.83,-708.82 22.08,-711.28 103.57,-701.27 194.12,-683.16 235,-667.46 235,-622.5 -120,-622.5 cw(c-120,-615)

## Other copper
Top Layer:
  pour cut-out: 520,-130 540,-110 540,-70 475,-70 405,0 265,0 265,-105 285,-125 285,-250 355,-250 405,-200 405,-130
  pour cut-out: -390,100 -390,-115 -160,-115 -160,100

## Silkscreen, mask and mechanical layers (free items; w line width, h text height)
Top Overlay:
  drawing of 32 lines, arcs and shapes, not listed
  text "A" at -615,240 h60
  text "B" at -445,-495 h60
  text "C" at -295,-495 h60
Bottom Overlay:
  drawing of 4 lines, arcs and shapes, not listed
  text "ZQ Motor" at 548,236.28 h60
Mechanical 1:
  circle w10: c-351.07,-557.07 r44.12
  circle w10: c351.07,557.07 r44.12
  lines w10: -703.91,-162.57 ccw(c0,0) -682.28,-237.53 ccw(c-645.1,-224.58) -630.03,-260.96 -589.18,-244.04 cw(c-574.11,-280.41) -540.02,-260.73 -495.81,-337.31 cw(c-529.9,-356.99) -505.93,-388.23 -541.01,-415.14 ccw(c-517.04,-446.38) -546.84,-472.1 ccw(c0,0) 703.91,-162.57 ccw(c627.19,-144.85) 658.08,-72.43 cw(c688.98,0) 657.17,72.03 ccw(c625.35,144.06) 702.08,161.73 ccw(c0,0) -702.08,161.73 ccw(c-625.35,144.06) -657.17,72.03 cw(c-688.98,0) -658.08,-72.43 ccw(c-627.19,-144.85) -703.91,-162.57

## Text inside footprints (layer, text, board x,y; h text height)
SW1: Top Overlay "ON" at -60,247.65 h20; Top Overlay "ON" at -60,297.66 h20; Top Overlay "ON" at -60,347.65 h20; Top Overlay "ON" at -60,397.65 h20